# Altium PCB DAC_PCB_July20.PcbDoc
Units mil, origin at the board's own origin, x right, y up, seen from the top; angles counter-clockwise.
Board outline 1555 x 2075 mil, 4 copper layers (Top Layer, VDD, GND, Bottom Layer), stack 23.756 mil thick; 28 components, 30 nets, 58 pads, 34 vias.
Unrouted connection lines stored in the file: 4.
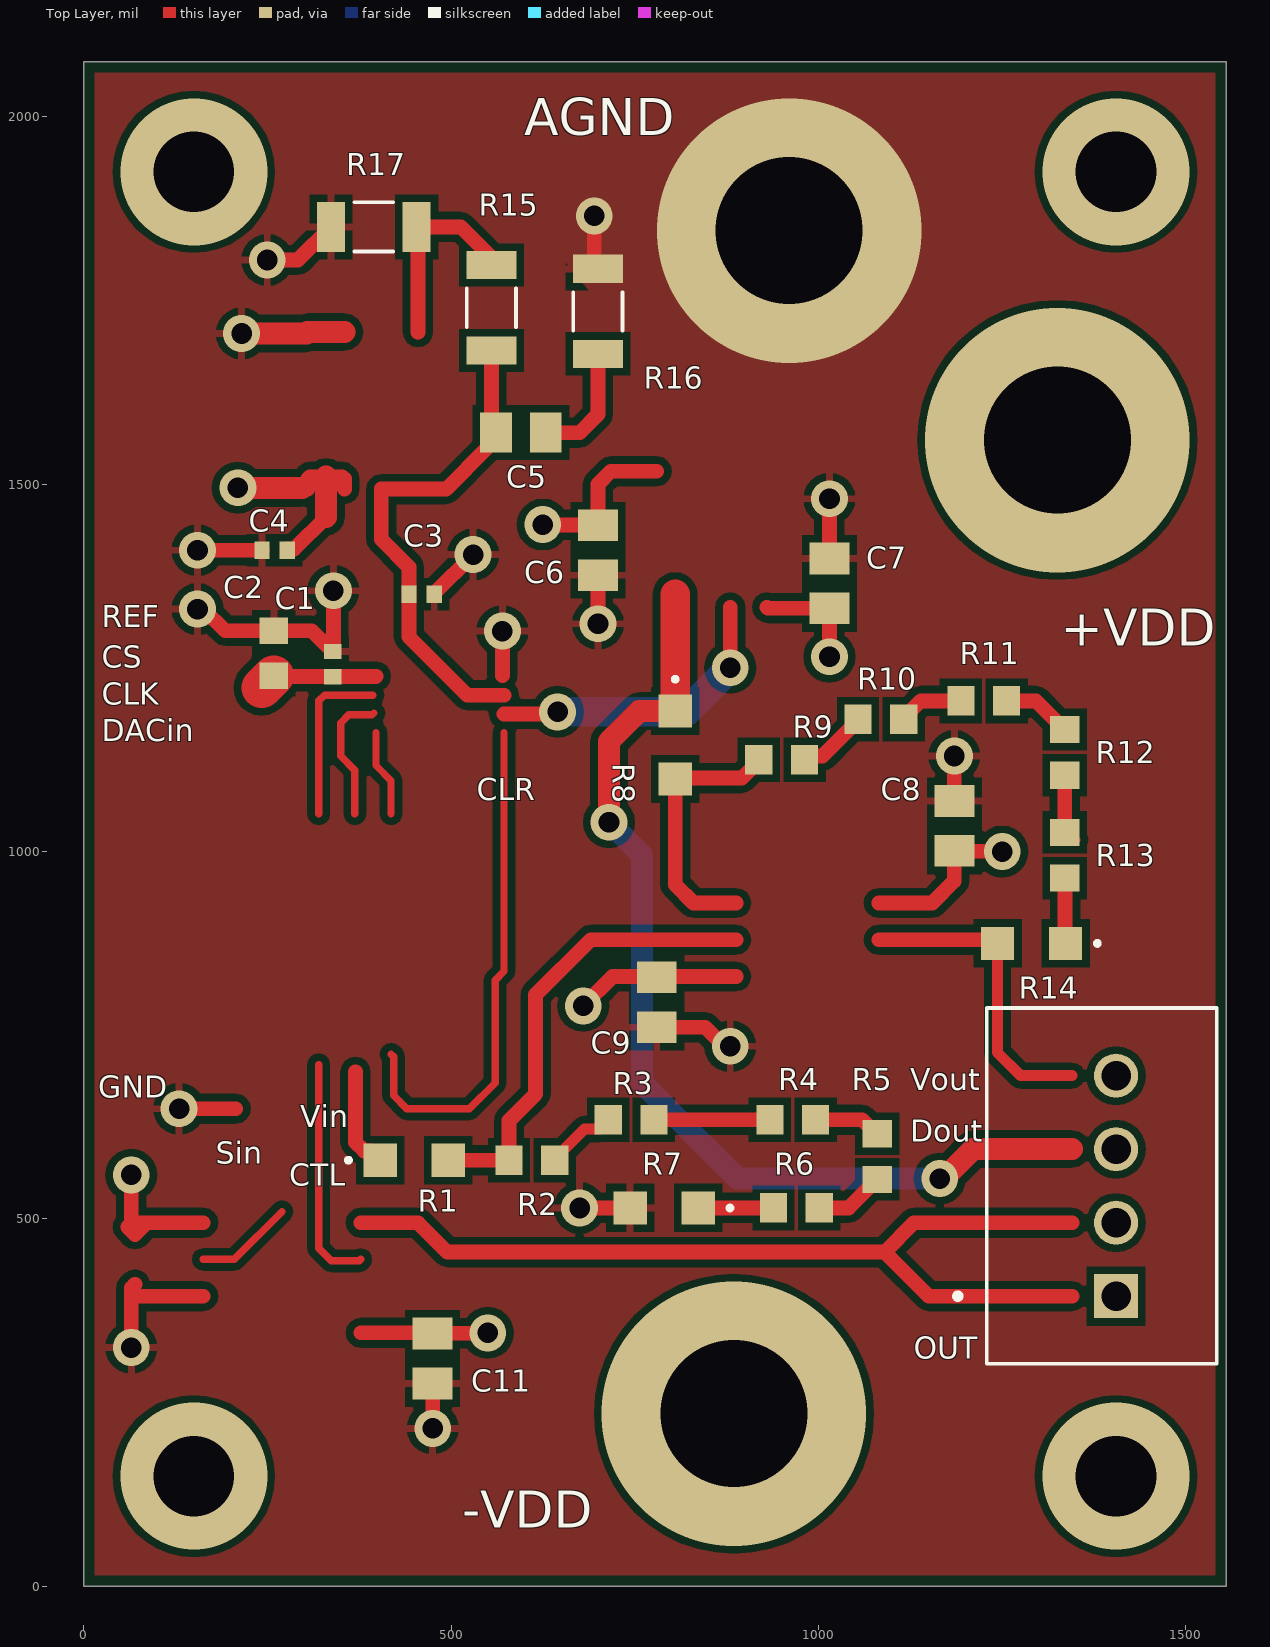
[diagram p0: Top Layer view]
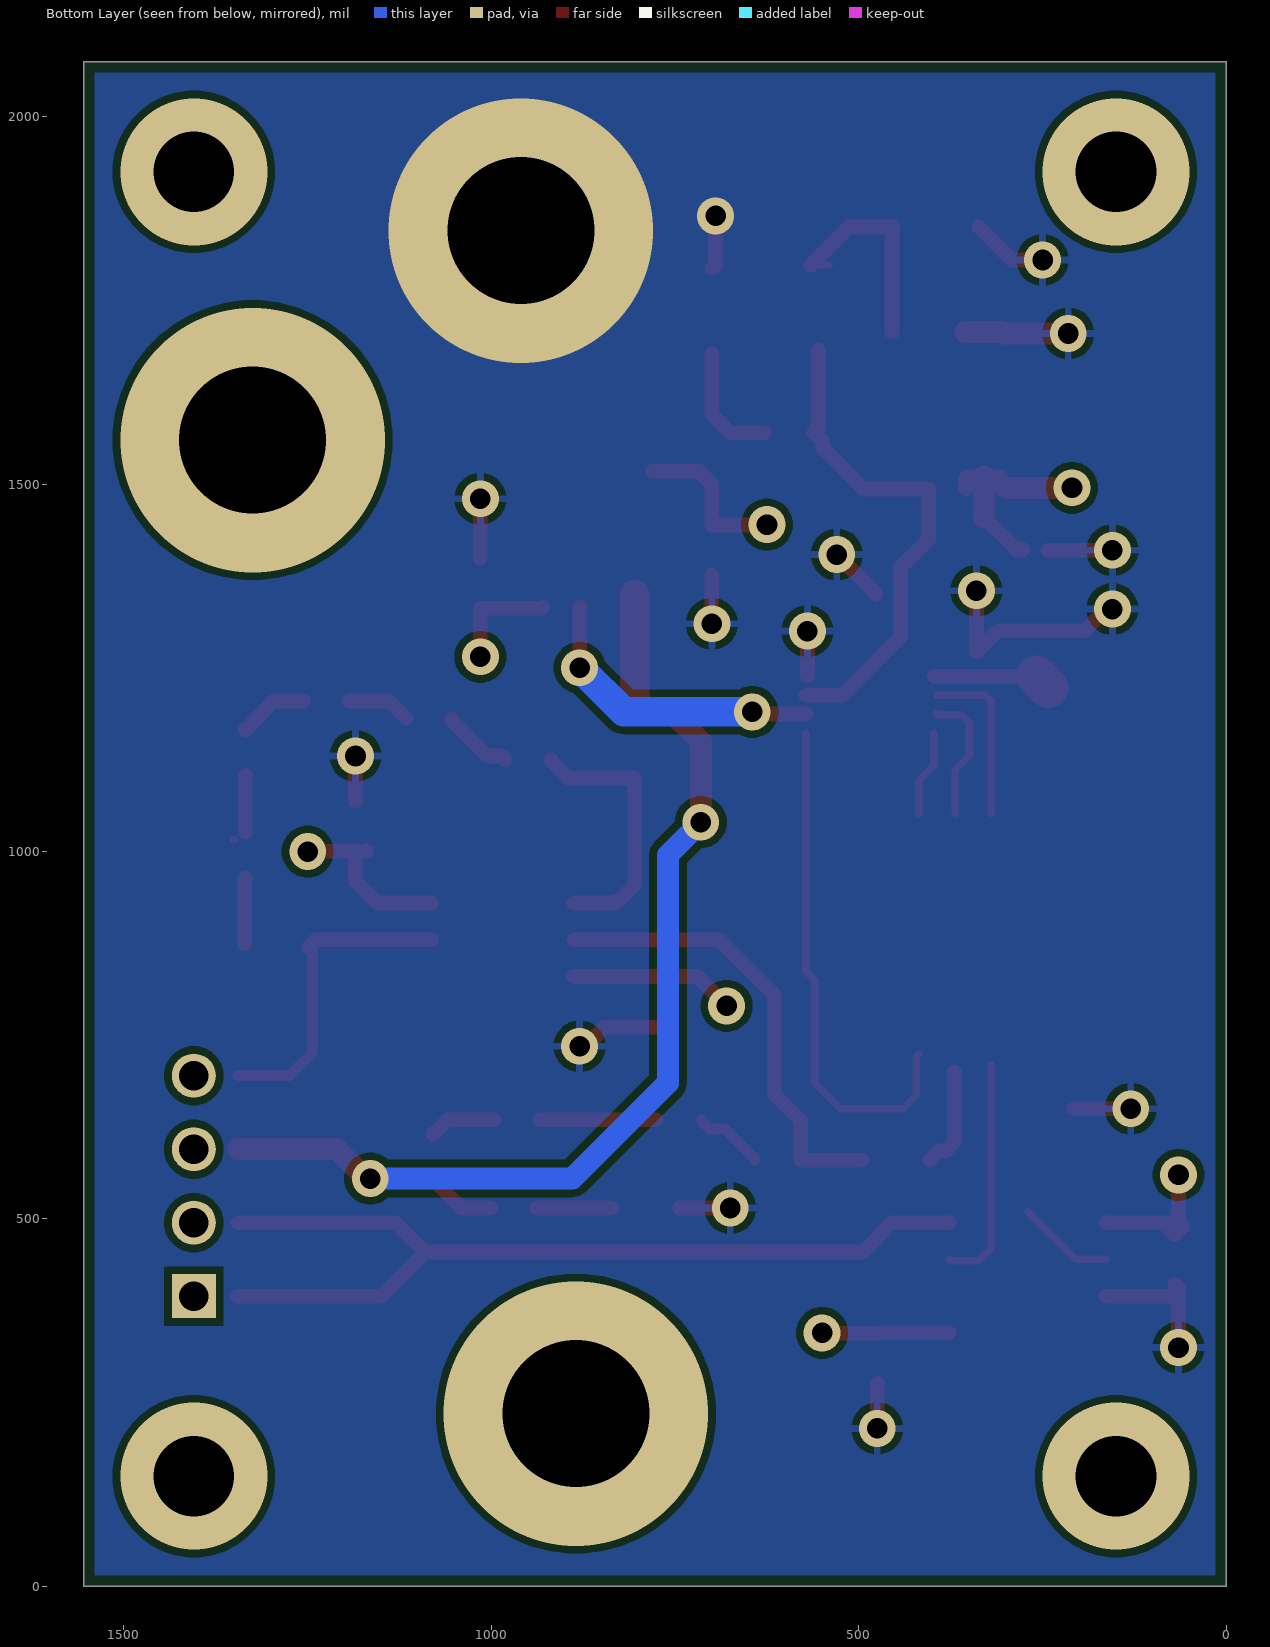
[diagram p1: Bottom Layer view, seen from below]
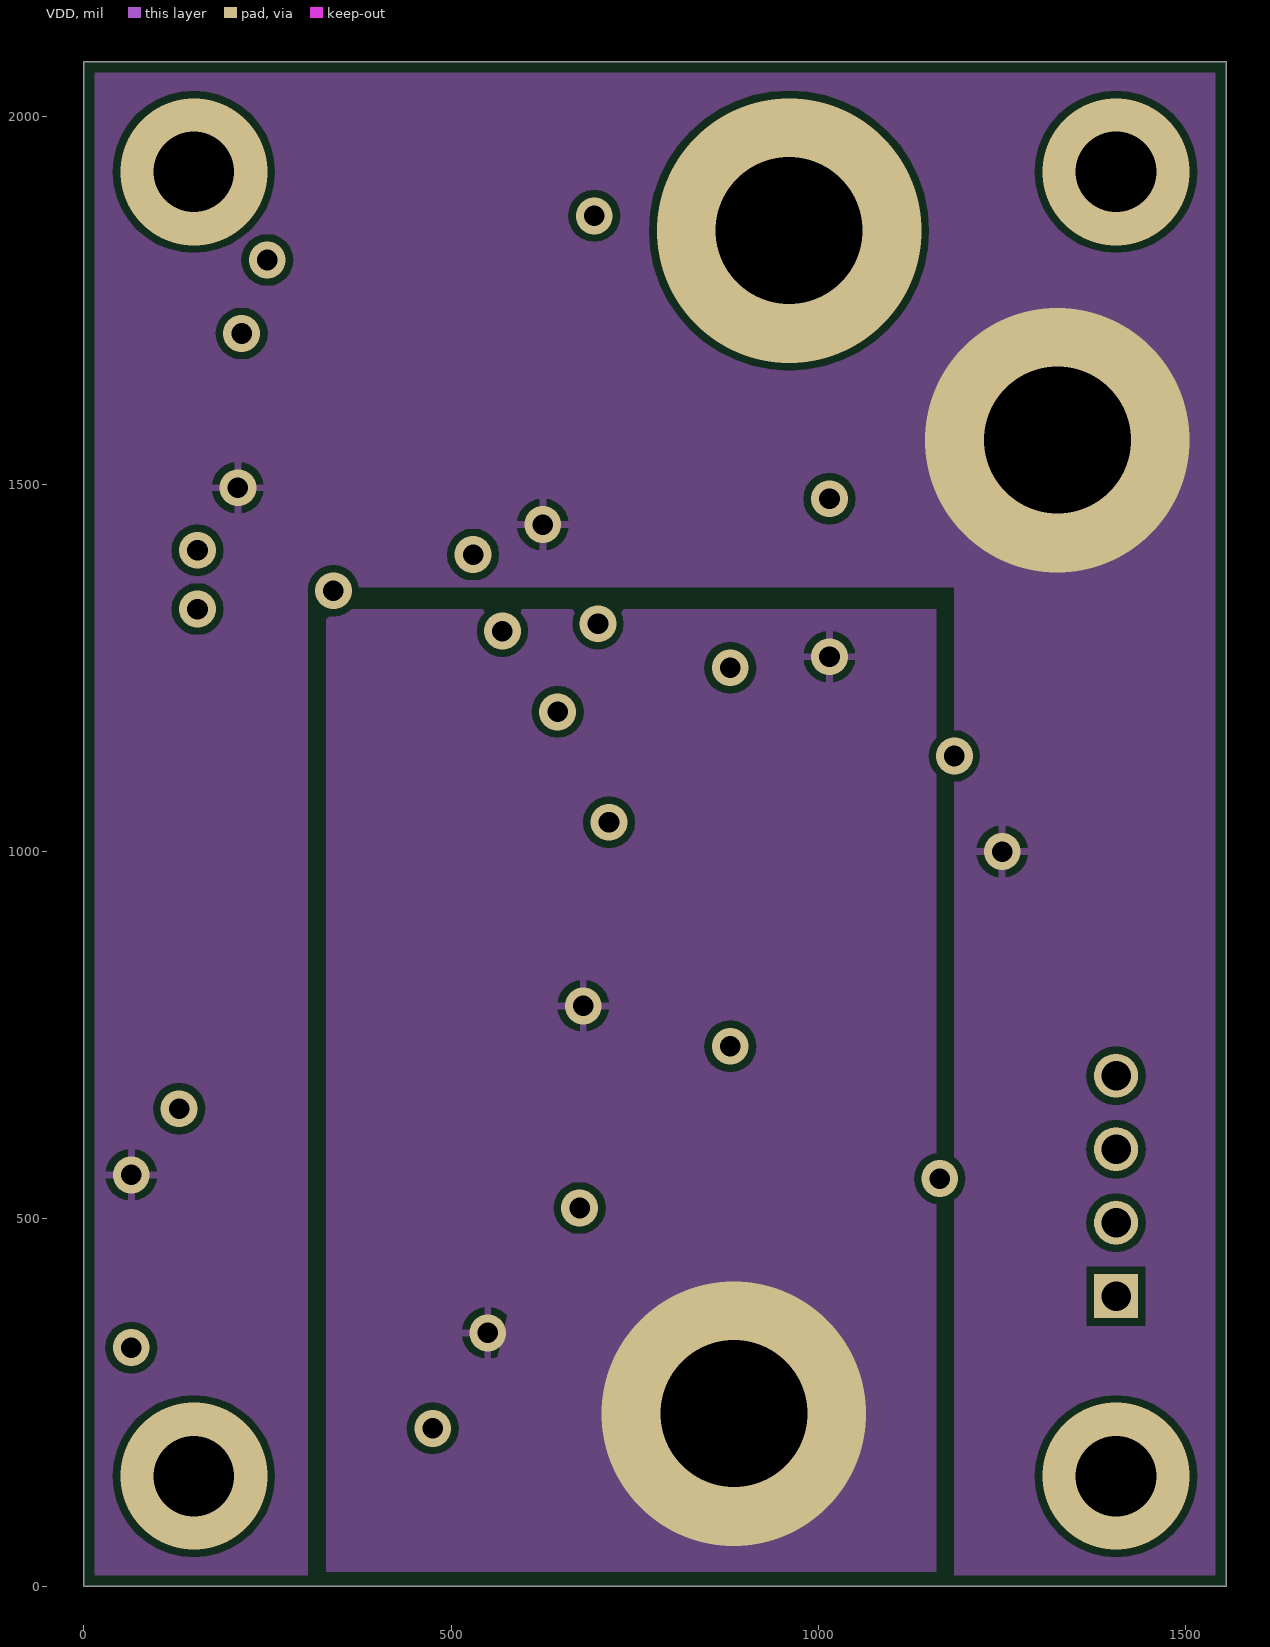
[diagram p2: VDD]
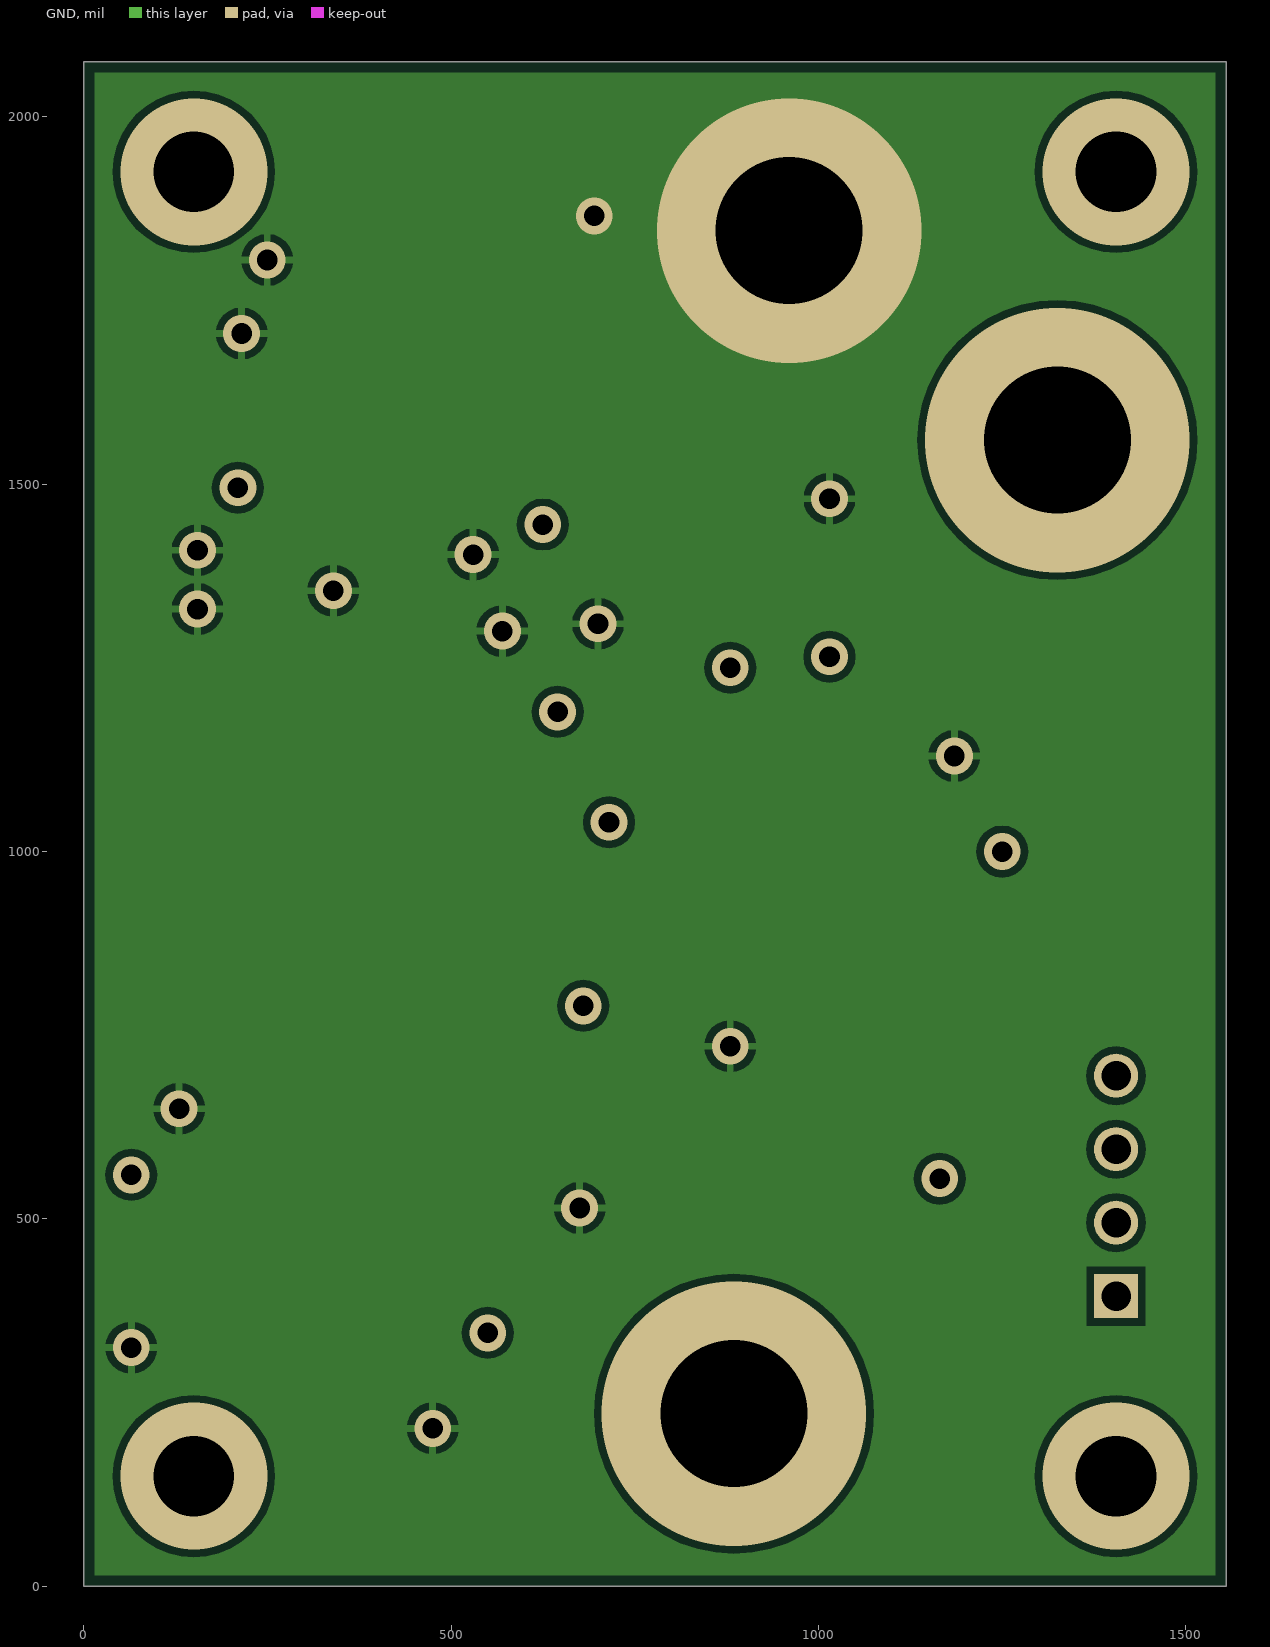
[diagram p3: GND]

## Layer stack, top to bottom
Top Solder: solder mask 1, Solder Resist, Dk 3.5
Top Layer: signal copper 1.4
Dielectric 1: prepreg 2.8, PP-006, Dk 4.1
VDD: signal copper 1.378
Dielectric 2: prepreg 12.6, FR-4, Dk 4.8
GND: signal copper 1.378
Dielectric 3: prepreg 2.8, PP-006, Dk 4.1
Bottom Layer: signal copper 1.4
Bottom Solder: solder mask 1, Solder Resist, Dk 3.5

## Board outline
0,0 1555,0 1555,2075 0,2075

## Design rules (kind name [scope] priority, off if disabled: settings)
Clearance [All] p1: gap=10 ignorepadtopadclearanceinfootprint=TRUE except(0: Arc-Hole Track-Hole SMDPad-Hole THPad-Hole Via-Hole Fill-Hole Poly-Hole Region-Hole Text-Hole; 5: Arc-Arc Arc-Track Arc-SMDPad Track-Track Track-SMDPad SMDPad-SMDPad)
PolygonConnect [All] p1: connectstyle=Relief reliefconductorwidth=10 reliefentries=4 polygonreliefangle="90 Angle" airgapwidth=10
RoutingVias [All] p1: holewidth=28 width=50 viastyle="Through Hole" minholewidth=28 minwidth=50 maxholewidth=300 maxwidth=500
SolderMaskExpansion [All] p1: expansion=4 istentingtop=FALSE
Width [All] p1: maxlimit=100 minlimit=10 preferedwidth=10
30 further rules are at their usual default settings.

## Classes and differential pairs
component class DAC_Connectors: OUT

## Components (designator, comment, footprint, x,y, rotation, side; value= is the part's Value field where it differs from the comment)
C1 "C1005X5R1C104K050BA" CAPC1005X55N 339,1255 r90 top
C2 "0603YD105KAT2A" CAPC1608X90N 259,1270 r90 top
C3 "C1005X5R1C104K050BA" CAPC1005X55N 460,1350 r180 top
C4 "C1005X5R1C104K050BA" CAPC1005X55N 260,1410 r180 top
C5 "CL21A475KQFNNNG" CAPC2012X135N 595,1570 r0 top
C6 "CL21A106KPFNNNG" CAPC2012X135N 700,1410 r270 top
C7 "CL21A106KPFNNNG" CAPC2012X135N 1015,1365 r90 top
C8 "CL21A106KPFNNNG" CAPC2012X135N 1185,1035 r90 top
C9 "CL21A106KPFNNNG" CAPC2012X135N 780,795 r270 top
C11 "CL21A106KPFNNNG" CAPC2012X135N 475,310 r270 top
OUT "2-644861-4" TE_2-644861-4 1405,545 r90 top
R1 "ERA-6ARW102V" ERA6A_(0805) 450,580 r0 top
R2 "RG1608N-513-W-T1" RESC1608X50N 610,580 r0 top
R3 "RG1608N-513-W-T1" RESC1608X50N 745,635 r0 top
R4 "RG1608N-513-W-T1" RESC1608X50N 965,635 r0 top
R5 "RG1608N-513-W-T1" RESC1608X50N 1080,585 r270 top
R6 "RG1608N-513-W-T1" RESC1608X50N 970,515 r180 top
R7 "ERA-6ARW102V" ERA6A_(0805) 790,515 r180 top
R8 "ERA-6ARW102V" ERA6A_(0805) 805,1145 r270 top
R9 "RG1608N-513-W-T1" RESC1608X50N 950,1125 r0 top
R10 "RG1608N-513-W-T1" RESC1608X50N 1085,1180 r0 top
R11 "RG1608N-513-W-T1" RESC1608X50N 1225,1205 r0 top
R12 "RG1608N-513-W-T1" RESC1608X50N 1335,1135 r270 top
R13 "RG1608N-513-W-T1" RESC1608X50N 1335,995 r270 top
R14 "ERA-6ARW102V" ERA6A_(0805) 1290,875 r180 top
R15 "RQ73C2B523KBTD" RESC3116X75N 555,1740 r90 top
R16 "RNCF1206AKT10R0" RESC3015X65N 700,1735 r90 top
R17 "RQ73C2B169KBTD" RESC3116X75N 395,1850 r180 top

## Footprints (in the part's own frame and the unit in brackets; to place one, negate y for a bottom-side part, rotate by r counter-clockwise, add the part's x,y. Pads: shape width x height; smd on the part's side, far side on the other; paste and mask are expansions set on the pad)
CAPC1005X55N [mm]
  rect 0.53x0.6 smd: 1(-0.437,0) 2(0.437,0)
CAPC1608X90N [mm]
  rect 0.92x0.98 smd: 1(-0.775,0) 2(0.775,0)
CAPC2012X135N [mm]
  rect 1.1x1.38 smd: 1(-0.863,0) 2(0.863,0)
ERA6A_(0805) [mm]
  rect 1.15x1.15 smd: 1(-1.175,0) 2(1.175,0)
  silkscreen extent -2.32,-0.05 -2.22,0.05, body extent -1,-0.63 1,0.63, height 0.5
RESC1608X50N [mm]
  rect 0.94x1.02 smd: 1(-0.79,0) 2(0.79,0)
RESC3015X65N [mm]
  rect 0.98x1.72 smd: 1(-1.47,0) 2(1.47,0)
  silkscreen extent -0.66,-0.85 0.66,0.85
RESC3116X75N [mm]
  rect 0.97x1.73 smd: 1(-1.48,0) 2(1.48,0)
  silkscreen extent -0.67,-0.85 0.67,0.85
TE_2-644861-4 [mil]
  rect 60x60 hole 40: 1(-150,0)
  round 60 hole 40: 2(-50,0) 3(50,0) 4(150,0)
  silkscreen extent -242,-137 242,219

## Part data
C1 C3 C4: "CERAMIC CAPACITOR, 0.1UF, 16V, X5R, 10%, 0402", Package=None, Availability=Unavailable, MP=C1005X5R1C104K050BA, Price=None
C2: "1ÂµF Â±10% 16V Ceramic Capacitor X5R 0603 (1608 Metric)", Package="1608 AVX", Availability=Unavailable, DigiKey-Purchase-URL=https://snapeda.com/shop?store=DigiKey&id=270397, MF=AVX, MP=0603YD105KAT2A, Price=None, SnapEDA_Link=https://www.snapeda.com/parts/0603YD105KAT2A/AVX%20/%20Kyocera/view-part/270397/?ref=snap
C5: "4.7U 6.3V K0805 X5R", Package=None, Availability=Unavailable, MP=CL21A475KQFNNNG, Price=None
C6 C7 C8 C9 C11: "10ÂµF Â±10% 10V Ceramic Capacitor X5R 0805 (2012 Metric)", Package="0805 Samsung", Arrow_Electronics-Purchase-URL=https://snapeda.com/shop?store=Arrow+Electronics&id=3598324, Digi-Key_Part_Number=1276-6456-1-ND, DigiKey-Purchase-URL=https://snapeda.com/shop?store=DigiKey&id=3598324, MF="Samsung Electro-Mechanics", Mouser-Purchase-URL=https://snapeda.com/shop?store=Mouser&id=3598324, MP=CL21A106KPFNNNG, SnapEDA_Link=https://www.snapeda.com/parts/CL21A106KPFNNNG/Samsung%20Electro-Mechanics/view-part/3598324/?ref=snap
OUT: "Connector Header Through Hole 4 position 0.100 (2.54mm)", Package=None, Availability=Good, Check_prices=https://www.snapeda.com/parts/2-644861-4/TE%20Connectivity%20AMP%20Connectors/view-part/2876279/?ref=eda, MF="TE Connectivity", MP=2-644861-4, Price=None, Purchase-URL=https://pricing.snapeda.com/search/part/2-644861-4/?ref=eda, SnapEDA_Link=https://www.snapeda.com/parts/2-644861-4/TE%20Connectivity%20AMP%20Connectors/view-part/2876279/?ref=snap
R1 R7 R8 R14: "Resistor", Manufacturer_Name=Panasonic, Datasheet Link=http://industrial.panasonic.com/cdbs/www-data/pdf/RDM0000/AOA0000C307.pdf, Height=0.6mm, Manufacturer_Part_Number=ERA-6ARW102V
R2 R3 R4 R5 R6 R9 R10 R11 R12 R13 R15 R16 R17: Package=None, Availability=Unavailable, Price=None
  R2 R3 R4 R5 R6 R9 R10 R11 R12 R13: MP=RG1608N-513-W-T1
  R15: MP=RQ73C2B523KBTD
  R16: MP=RNCF1206AKT10R0
  R17: MP=RQ73C2B169KBTD

## Via types
v1: diameter 50, hole 28, Top Layer to Bottom Layer, 27 vias
v2: diameter 200, hole 110, Top Layer to Bottom Layer, 4 vias
v3: diameter 360, hole 200, Top Layer to Bottom Layer, 3 vias

## Nets (pads, with @x,y where several pads share a name; then routed paths per layer and width w, separated by ;. In a path a pad name is that pad's centre, name@x,y a point inside that pad or via, vN(x,y) a via of type N, cw(c..) or ccw(c..) an arc to the next point about the centre after c; other vN are vias at no path point)
+VDD: C4.1 C6.1 C8.1 | length 944.2
  Top Layer w20: v1(65,560) 65,493.98 ; 81.65,490.63 70,478.98 60,488.98 ; 163,495 66.02,495 65,493.98 ; C4.1 277.2,1411.38 277.64,1411.81 286.81,1411.81 330,1455 ; 305,1493.23 305,1507.2 307.8,1510 330,1510 352.2,1510 355,1507.2 355,1493.23 ; v1@626.26,1446.26 v1(625,1445) 625.51,1444.49 699.49,1444.49 C6.1 700,1500 717.52,1517.52 780,1517.52 ; 1082,930 1155,930 1185,960 C8.1 ; C8.1@1170,1000 C8.1@1171.02,1001.02 ; C8.1@1190.51,1001.02 1191.02,1000.51 1249.49,1000.51 v1(1250,1000) ; 60,488.98 65,493.98 ; 60,488.98 63.35,488.98 65,490.63 65,493.98
  Top Layer w30: v1(210,1495) 297.2,1495 ; 330,1455 330,1510
  other v3: 1325,1560
-VDD: C7.1 C9.1 C11.1 | length 647.7
  Top Layer w20: 377,345 470,345 470.51,344.49 549.49,344.49 v1(550,345) ; v1(680,790) 720,830 883,830 ; C9.1@785,830 888,830 ; 930,1332.48 931.24,1331.24 1015,1331.24 v1(1015,1265)
  other v3: 885,235
AGND: C1.2 C2.2 C3.1 C4.2 C6.2 C7.2 C8.2 C9.2 C11.2 R7.2 R16.2 R17.2 | length 1541.1
  Top Layer w10: C4.2 C4.2@242.8,1411.38 ; 303.23,1705 305,1706.77
  Top Layer w20: v1(65,325) 65,395 ; 70,411.02 65,406.02 65,395 ; v1(130,650) 207.21,650 ; v1(155,1330) 163.12,1330 192.61,1300.51 C2.2 310.69,1300.51 C1.2@332.19,1279.02 ; v1(155,1410) C4.2 ; 163,395 65,395 ; v1(250,1805) 291.73,1805 R17.2 ; C1.2@337.62,1272.2 339.57,1272.2 340,1272.64 v1(340,1355) ; v1(475,215) C11.2 ; C3.1 477.2,1351.38 v1(530,1404.17) ; 570,1239.53 v1(570,1300) ; v1(675,515) R7.2 ; v1(695,1865) 695,1797.87 R16.2 ; v1(700,1310) C6.2 ; C9.2 845.86,761.02 871.88,735 v1(880,735) ; C7.2 v1(1015,1480) ; C8.2 v1(1185,1130)
  Top Layer w30: v1(215,1705) 303.23,1705 ; 305,1706.77 355,1706.77
  other v3: 960,1845
DAC_CLR:  | length 699.4
  Top Layer w10: 418.43,724.37 421.9,720.9 421.9,668.1 440,650 525,650 560,685 560,825 572.09,837.09 572.09,1161.61
DACCS:  | length 230.7
  Top Layer w10: 320,1051.26 320,1205 327.8,1212.8 393.78,1212.8
DACSCLK:  | length 182.4
  Top Layer w10: 369.21,1051.26 369.21,1110.79 350,1130 350,1175 361,1186 392.57,1186 395.11,1188.54
DACVDD: C3.2 C5.1 R15.1 | length 686.2
  Top Layer w10: C3.2@442.8,1348.62 C3.2
  Top Layer w20: C3.2@442.8,1348.62 442.8,1292.2 522.2,1212.8 572.09,1212.8 ; C3.2 442.8,1387.2 405,1425 405,1493.23 455,1493.23 493.23,1493.23 549.37,1549.37 549.37,1558.35 C5.1 555,1576.02 R15.1
daout:  | length 416.4
  Top Layer w20: 572.09,1187.2 642.2,1187.2 v1(645,1190) ; v1(880,1250) 880,1332.48
  Bottom Layer w40: v1(645,1190) 819.79,1190 879.79,1250 v1(880,1250)
diffin: OUT.3 R8.1 | length 1404.9
  Top Layer w30: v1(715,1040) 715,1150 756.17,1191.17 804.91,1191.17 R8.1 ; v1(1165,555) 1170.41,555 1210.41,595 1345,595
  Top Layer w40: R8.1 805,1350
  Bottom Layer w30: v1(715,1040) 760,995 760,685 890,555 v1(1165,555)
NetC1_1: C1.1 C2.1 | length 185
  Top Layer w20: C2.1@260.26,1238.23 338.57,1238.23 C1.1 339.3,1238.09 397.62,1238.09 397.91,1238.39 ; C1.1@332.69,1238.39 347.69,1238.39 347.54,1238.23 C1.1@339.59,1238.23
  Top Layer w55: C2.1@242.22,1222.71 C2.1
NetC5_2: C5.2 R16.1 | length 163.5
  Top Layer w20: C5.2 675,1570 700,1595 R16.1
NetIN_1:  | length 118.9
  Top Layer w10: 397.91,1161.61 397.91,1117.09 418.43,1096.57 418.43,1051.26
NetIN_4: R1.1 | length 139.7
  Top Layer w20: 370,700.27 370,604.35 381.72,592.64 391.1,592.64 R1.1
NetIN_8:  | length 133.9
  Top Layer w10: 163,445 205,445 270,510
NetOUT_1: OUT.1 OUT.2 | length 1281
  Top Layer w20: 377,495 455,495 495,455 1090,455 ; 1345,395 1150,395 1090,455 ; 1345,495 1130,495 1090,455
NetOUT_4: OUT.4 R14.2 | length 433.8
  Top Layer w15: R14.2 1243.74,726.26 1275,695 1345,695
  Top Layer w20: 1082,880 1238.74,880 R14.2 R14.2@1248.74,870
NetR1_2: R1.2 R2.1 | length 626.7
  Top Layer w20: R1.2 R2.1 578.9,633.9 615,670 615,805 690,880 888,880
NetR2_2: R2.2 R3.1 | length 97.4
  Top Layer w15: R2.2 641.1,581.57 681.95,622.42 702.89,622.42 713.9,633.43 R3.1
NetR3_2: R3.2 R4.1 | length 157.8
  Top Layer w20: R3.2 R4.1
NetR4_2: R4.2 R5.1 | length 91.7
  Top Layer w20: R4.2 1059.53,635 1078.43,616.1 R5.1
NetR5_2: R5.2 R6.1 | length 95.9
  Top Layer w20: R6.1 1041.1,515 1069.92,543.82 1069.92,545.39 1078.43,553.9 R5.2
NetR6_2: R6.2 R7.1 | length 102.6
  Top Layer w20: R7.1 935,515 R6.2
NetR8_2: R8.2 R9.1 | length 363
  Top Layer w10: 887.86,930.14 888,930
  Top Layer w20: 888,930 830,930 805,955 R8.2 806.26,1100 895.47,1100 918.9,1123.43 R9.1
NetR9_2: R9.2 R10.1 | length 96.5
  Top Layer w20: R9.2 986.1,1130 1005.47,1130 1053.9,1178.43 R10.1
NetR10_2: R10.2 R11.1 | length 87.5
  Top Layer w20: R10.2@1116.1,1181.57 1139.53,1205 R11.1
NetR11_2: R11.2 R12.1 | length 95.7
  Top Layer w20: R11.2 1295.99,1205 1324.92,1176.07 1324.92,1174.61 1333.43,1166.1 R12.1@1334.88,1166.1
NetR12_2: R12.2 R13.1 | length 79.4
  Top Layer w10: R13.1@1350,1016.1 R13.1@1351.57,1016.1
  Top Layer w20: R13.1 R12.2
NetR13_2: R13.2 R14.1 | length 89.4
  Top Layer w20: R13.2 1335.63,963.27 1335.63,875.63 R14.1
NetR15_2: R15.2 R17.1 | length 292.1
  Top Layer w10: R17.1 R17.1@455,1848.27 ; R15.2@540.04,1798.27 R15.2
  Top Layer w20: R17.1 513.31,1850 R15.2@565.04,1798.27 ; 455,1706.77 R17.1@455,1848.27
"S&H Control":  | length 314.7
  Top Layer w10: 320,709.95 320,460 336.86,443.14 375.14,443.14 377,445
copper on no net:
  other v2: 150,150 1405,150 150,1925 1405,1925

## Polygon pours and split planes (outlines as drawn)
+VDD on VDD "+VDD_L02_P009" (solid, pour order 9): 15,15 305,15 305,1360 1185,1360 1185,15 1540,15 1540,2060 15,2060
-VDD on VDD "-VDD_L02_P007" (solid, pour order 7): 330,20 330,1330 1160,1330 1160,20
AGND on GND "AGND_L03_P004" (solid, pour order 4): 0,2075 1555,2075 1555,0 0,0
AGND on Bottom Layer "Bottom_AGND" (solid, pour order 10): 0,0 1555,0 1555,2075 0,2075
AGND on Top Layer "AGND_L01_P006" (solid, pour order 6): 0,2075 1555,2075 1555,0 0,0

## Silkscreen, mask and mechanical layers (free items; w line width, h text height)
Top Overlay:
  text "AGND" at 600,1975 h50
  text "REF" at 25,1305 h30
  text "+VDD" at 1330,1280 h50
  text "CS" at 25,1250 h30
  text "CLK" at 25,1200 h30
  text "DACin" at 25,1150 h30
  text "CLR" at 535,1070 h30
  text "Vout" at 1125,675 h30
  text "GND" at 20,665 h30
  text "Vin" at 295,625 h30
  text "Dout" at 1125,605 h30
  text "Sin" at 180,575 h30
  text "CTL" at 280,545 h30
  text "-VDD" at 515,80 h50